# EAGLE board LibreServo_v1_c (EAGLE 9.2.0)
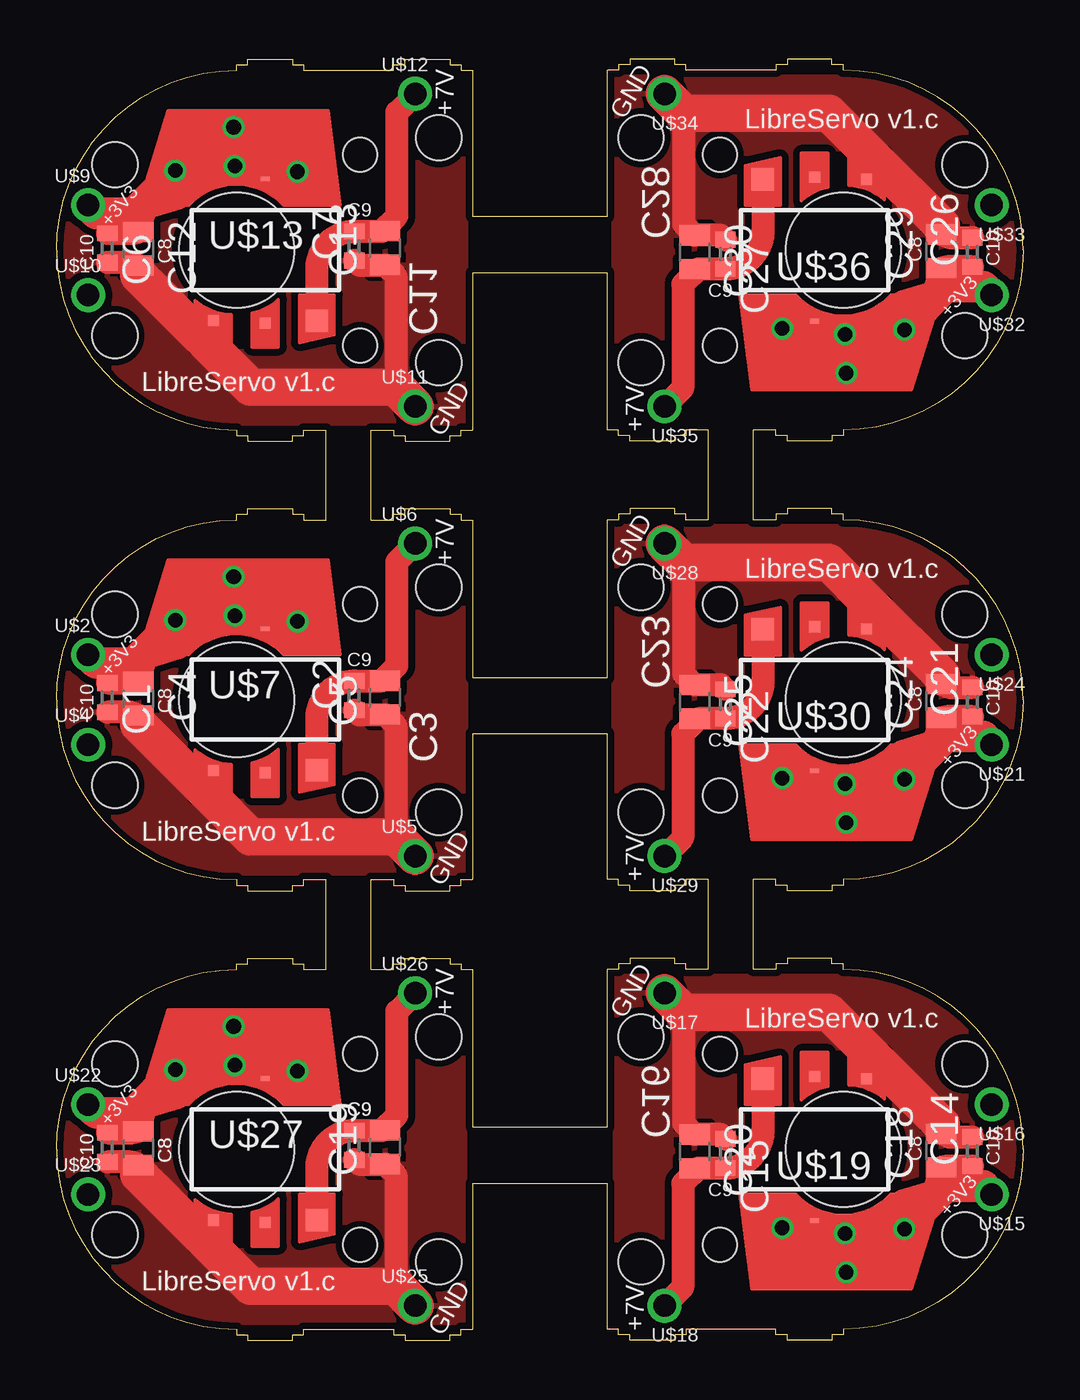
[diagram p0: board, top side]
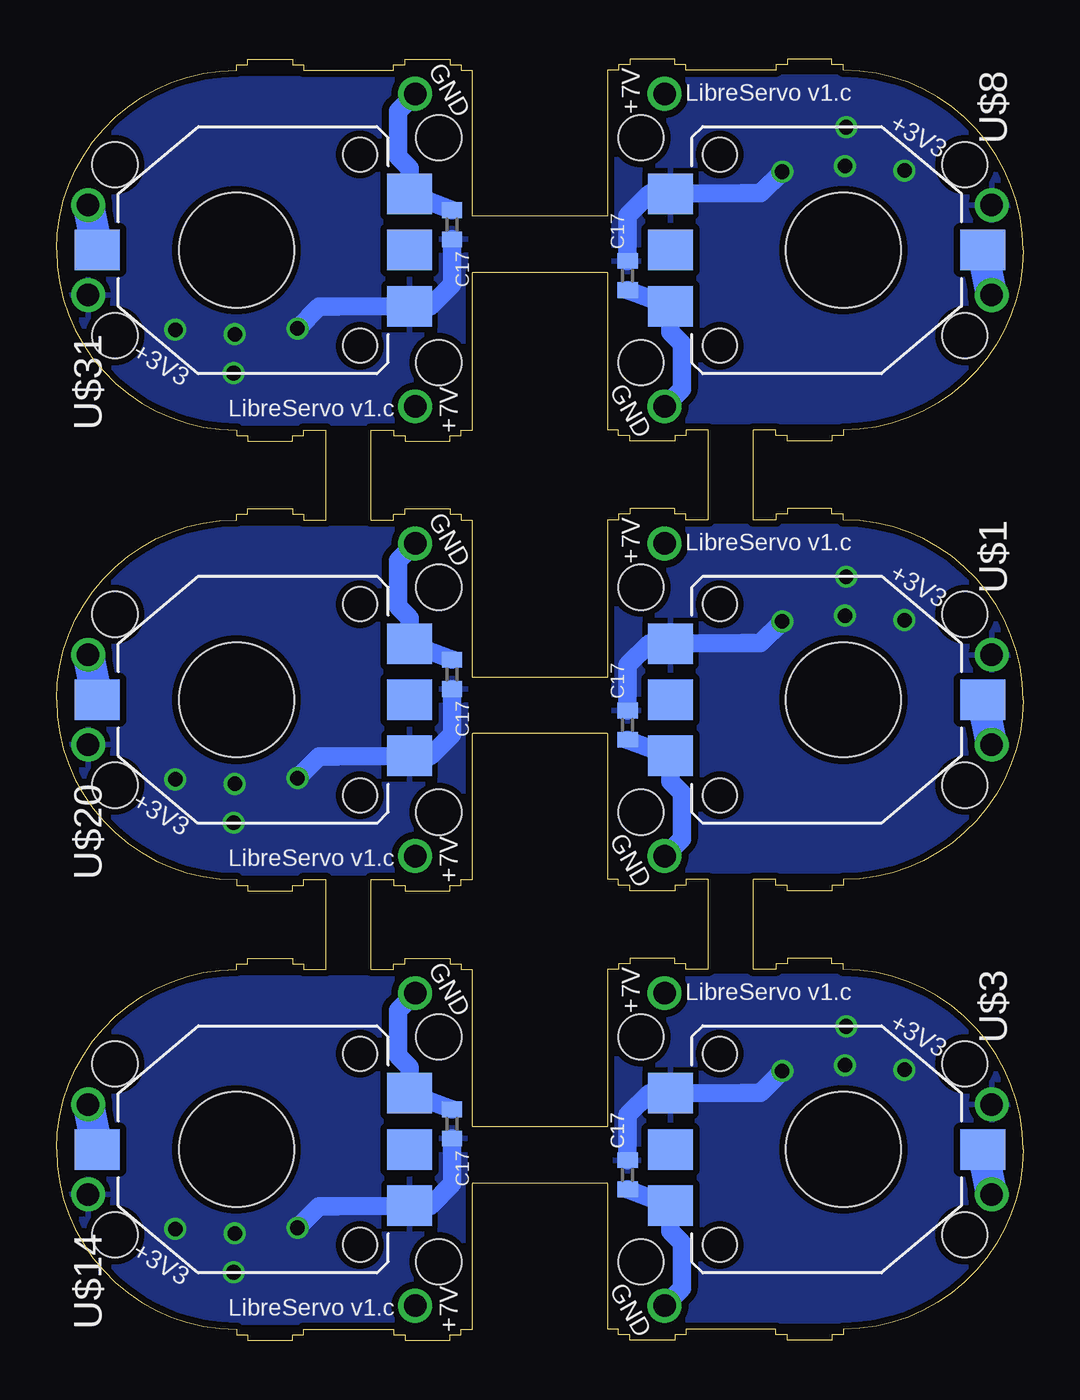
[diagram p1: board, bottom side, seen from below]

Size 43 x 57 mm. Coordinates in mm from the lower left corner, seen from the top.
Outline: 18.5,16.5 18.5,9.5 24.5,9.5 24.5,16.5 25,16.5 25,16.75 25.5,16.75 25.5,17 27.5,17 27.5,16.75 28,16.75 28,16.5 29,16.5 29,20.5 28,20.5 28,20.25 27.5,20.25 27.5,20 25.5,20 25.5,20.25 25,20.25 25,20.5 24.5,20.5 24.5,27 18.5,27 18.5,20.5 18,20.5 18,20.25 17.5,20.25 17.5,20 15.5,20 15.5,20.25 15,20.25 15,20.5 14,20.5 14,16.5 15,16.5 15,16.75 15.5,16.75 15.5,17 17.5,17 17.5,16.75 18,16.75 18,16.5 18.5,16.5
Outline: 18.5,7 18.5,0.5 18,0.5 18,0.25 17.5,0.25 17.5,0 15.5,0 15.5,0.25 15,0.25 15,0.5 11,0.5 11,0.25 10.5,0.25 10.5,0 8.5,0 8.5,0.25 8,0.25 8,0.5 arc-90 0,8.5 arc-90 8,16.5 8,16.75 8.5,16.75 8.5,17 10.5,17 10.5,16.75 11,16.75 11,16.5 12,16.5 12,20.5 11,20.5 11,20.25 10.5,20.25 10.5,20 8.5,20 8.5,20.25 8,20.25 8,20.5 arc-90 0,28.5 arc-90 8,36.5 8,36.75 8.5,36.75 8.5,37 10.5,37 10.5,36.75 11,36.75 11,36.5 12,36.5 12,40.5 11,40.5 11,40.25 10.5,40.25 10.5,40 8.5,40 8.5,40.25 8,40.25 8,40.5 arc-90 0,48.5 arc-90 8,56.5 8,56.75 8.5,56.75 8.5,57 10.5,57 10.5,56.75 11,56.75 11,56.5 15,56.5 15,56.75 15.5,56.75 15.5,57 17.5,57 17.5,56.75 18,56.75 18,56.5 18.5,56.5 18.5,50 24.5,50 24.5,56.5 25,56.5 25,56.75 25.5,56.75 25.5,57 27.5,57 27.5,56.75 28,56.75 28,56.5 32,56.5 32,56.75 32.5,56.75 32.5,57 34.5,57 34.5,56.75 35,56.75 35,56.5 arc-90 43,48.5 arc-90 35,40.5 35,40.25 34.5,40.25 34.5,40 32.5,40 32.5,40.25 32,40.25 32,40.5 31,40.5 31,36.5 32,36.5 32,36.75 32.5,36.75 32.5,37 34.5,37 34.5,36.75 35,36.75 35,36.5 arc-90 43,28.5 arc-90 35,20.5 35,20.25 34.5,20.25 34.5,20 32.5,20 32.5,20.25 32,20.25 32,20.5 31,20.5 31,16.5 32,16.5 32,16.75 32.5,16.75 32.5,17 34.5,17 34.5,16.75 35,16.75 35,16.5 arc-90 43,8.5 arc-90 35,0.5 35,0.25 34.5,0.25 34.5,0 32.5,0 32.5,0.25 32,0.25 32,0.5 28,0.5 28,0.25 27.5,0.25 27.5,0 25.5,0 25.5,0.25 25,0.25 25,0.5 24.5,0.5 24.5,7 18.5,7
Outline: 18.5,36.5 18.5,29.5 24.5,29.5 24.5,36.5 25,36.5 25,36.75 25.5,36.75 25.5,37 27.5,37 27.5,36.75 28,36.75 28,36.5 29,36.5 29,40.5 28,40.5 28,40.25 27.5,40.25 27.5,40 25.5,40 25.5,40.25 25,40.25 25,40.5 24.5,40.5 24.5,47.5 18.5,47.5 18.5,40.5 18,40.5 18,40.25 17.5,40.25 17.5,40 15.5,40 15.5,40.25 15,40.25 15,40.5 14,40.5 14,36.5 15,36.5 15,36.75 15.5,36.75 15.5,37 17.5,37 17.5,36.75 18,36.75 18,36.5 18.5,36.5
Copper layers (1*16): Top 0.035mm / dielectric 1.5mm / Bottom 0.035mm
Design rules "ITEADstudio_DRC": minimum track width 6mil, minimum drill 12mil, track to track 6mil, track to pad 6mil, pad to pad 6mil, via to via 6mil, smd to smd 0mil, copper to edge 10mil, drill to drill 10mil, minimum pad ring 10mil, minimum via ring 6mil, stop-mask expansion 2mil, vias tented up to drill 100mil, thermal gap 10mil
Holes 2 mm at 2.6,12.3 2.6,4.7 17,13.5 17,3.5 2.6,32.3 2.6,24.7 17,33.5 17,23.5 2.6,52.3 2.6,44.7 17,53.5 17,43.5 40.4,4.7 40.4,12.3 26,3.5 26,13.5 40.4,24.7 40.4,32.3 26,23.5 26,33.5 40.4,44.7 40.4,52.3 26,43.5 26,53.5

## Footprints (pad centres in the part's own frame; a part is rotated, then mirrored left to right if it is on the bottom)
C0402 = smd 0.7 x 0.9: 1 -0.65,0; 2 0.65,0
0805_MIN = smd 0.9 x 1.35: 1 -0.75,0; 2 0.75,0
MURATA_SV01 = smd 1.8 x 2: P$1 -2.5,-7.7; P$2 0,-7.7; P$3 2.5,-7.7; P$4 0,6.2 | hole 5.1: 0,0 | hole 1.5: -4.25,-5.5; 4.25,-5.5
HEADER_1_MIN = drill 1: P$1 0,0
SOT223_MOD = smd 0.5 x 0.5: P$1 -2.3,-3.15; P$2 0,-3.252 | smd 1 x 1: P$3 2.3,-3.15 | smd 0.406 x 0.203: P$4 0,3.15

## Placement (x,y rotation side)
C1  100nF  [C0402]  2.26,28.6 270 top
C2  100nF  [C0402]  13.24,28.69 90 top
C3  100nF  [C0402]  17.6,27.37 270 bottom
C4  22uF  [0805_MIN]  3.65,28.55 270 top
C5  22uF  [0805_MIN]  14.61,28.59 90 top
C6  100nF  [C0402]  2.26,48.6 270 top
C7  100nF  [C0402]  13.24,48.69 90 top
C8  22uF  [0805_MIN]  3.65,8.55 270 top
C9  100nF  [C0402]  13.24,8.69 90 top
C10  100nF  [C0402]  2.26,8.6 270 top
C11  100nF  [C0402]  17.6,47.37 270 bottom
C12  22uF  [0805_MIN]  3.65,48.55 270 top
C13  22uF  [0805_MIN]  14.61,48.59 90 top
C14  100nF  [C0402]  40.74,8.4 90 top
C15  100nF  [C0402]  29.76,8.31 270 top
C16  100nF  [C0402]  25.4,9.63 90 bottom
C17  100nF  [C0402]  17.6,7.37 270 bottom
C18  22uF  [0805_MIN]  39.35,8.45 90 top
C19  22uF  [0805_MIN]  14.61,8.59 90 top
C20  22uF  [0805_MIN]  28.39,8.41 270 top
C21  100nF  [C0402]  40.74,28.4 90 top
C22  100nF  [C0402]  29.76,28.31 270 top
C23  100nF  [C0402]  25.4,29.63 90 bottom
C24  22uF  [0805_MIN]  39.35,28.45 90 top
C25  22uF  [0805_MIN]  28.39,28.41 270 top
C26  100nF  [C0402]  40.74,48.4 90 top
C27  100nF  [C0402]  29.76,48.31 270 top
C28  100nF  [C0402]  25.4,49.63 90 bottom
C29  22uF  [0805_MIN]  39.35,48.45 90 top
C30  22uF  [0805_MIN]  28.39,48.41 270 top
U$1  MURATA_SV01  [MURATA_SV01]  8,28.5 270 bottom
U$2  HEADER_1_MIN  [HEADER_1_MIN]  1.4,30.5 0 top
U$3  MURATA_SV01  [MURATA_SV01]  8,8.5 270 bottom
U$4  HEADER_1_MIN  [HEADER_1_MIN]  1.4,26.5 0 top
U$5  HEADER_1_MIN  [HEADER_1_MIN]  15.95,21.55 0 top
U$6  HEADER_1_MIN  [HEADER_1_MIN]  15.95,35.45 0 top
U$7  NCP1117DT33G  [SOT223_MOD]  9.28,28.51 0 top
U$8  MURATA_SV01  [MURATA_SV01]  8,48.5 270 bottom
U$9  HEADER_1_MIN  [HEADER_1_MIN]  1.4,50.5 0 top
U$10  HEADER_1_MIN  [HEADER_1_MIN]  1.4,46.5 0 top
U$11  HEADER_1_MIN  [HEADER_1_MIN]  15.95,41.55 0 top
U$12  HEADER_1_MIN  [HEADER_1_MIN]  15.95,55.45 0 top
U$13  NCP1117DT33G  [SOT223_MOD]  9.28,48.51 0 top
U$14  MURATA_SV01  [MURATA_SV01]  35,8.5 90 bottom
U$15  HEADER_1_MIN  [HEADER_1_MIN]  41.6,6.5 180 top
U$16  HEADER_1_MIN  [HEADER_1_MIN]  41.6,10.5 180 top
U$17  HEADER_1_MIN  [HEADER_1_MIN]  27.05,15.45 180 top
U$18  HEADER_1_MIN  [HEADER_1_MIN]  27.05,1.55 180 top
U$19  NCP1117DT33G  [SOT223_MOD]  33.72,8.49 180 top
U$20  MURATA_SV01  [MURATA_SV01]  35,28.5 90 bottom
U$21  HEADER_1_MIN  [HEADER_1_MIN]  41.6,26.5 180 top
U$22  HEADER_1_MIN  [HEADER_1_MIN]  1.4,10.5 0 top
U$23  HEADER_1_MIN  [HEADER_1_MIN]  1.4,6.5 0 top
U$24  HEADER_1_MIN  [HEADER_1_MIN]  41.6,30.5 180 top
U$25  HEADER_1_MIN  [HEADER_1_MIN]  15.95,1.55 0 top
U$26  HEADER_1_MIN  [HEADER_1_MIN]  15.95,15.45 0 top
U$27  NCP1117DT33G  [SOT223_MOD]  9.28,8.51 0 top
U$28  HEADER_1_MIN  [HEADER_1_MIN]  27.05,35.45 180 top
U$29  HEADER_1_MIN  [HEADER_1_MIN]  27.05,21.55 180 top
U$30  NCP1117DT33G  [SOT223_MOD]  33.72,28.49 180 top
U$31  MURATA_SV01  [MURATA_SV01]  35,48.5 90 bottom
U$32  HEADER_1_MIN  [HEADER_1_MIN]  41.6,46.5 180 top
U$33  HEADER_1_MIN  [HEADER_1_MIN]  41.6,50.5 180 top
U$34  HEADER_1_MIN  [HEADER_1_MIN]  27.05,55.45 180 top
U$35  HEADER_1_MIN  [HEADER_1_MIN]  27.05,41.55 180 top
U$36  NCP1117DT33G  [SOT223_MOD]  33.72,48.49 180 top

## Library data of the parts
C1-C3 C6 C7 C9-C11 C14-C17 C21-C23 C26-C28 = rcl
C4 C5 C8 C12 C13 C18-C20 C24 C25 C29 C30 U$1-U$36 = Propio

## Nets
+3V3_1: C1.1 C3.1 C4.1 U$1.P$1 U$2.P$1 U$7.P$4
+3V3_2: C6.1 C11.1 C12.1 U$8.P$1 U$9.P$1 U$13.P$4
+3V3_3: C8.1 C10.1 C17.1 U$3.P$1 U$22.P$1 U$27.P$4
+3V3_4: C14.1 C16.1 C18.1 U$14.P$1 U$15.P$1 U$19.P$4
+3V3_5: C21.1 C23.1 C24.1 U$20.P$1 U$21.P$1 U$30.P$4
+3V3_6: C26.1 C28.1 C29.1 U$31.P$1 U$32.P$1 U$36.P$4
+7V_1: C2.2 C5.2 U$6.P$1 U$7.P$3
+7V_2: C7.2 C13.2 U$12.P$1 U$13.P$3
+7V_3: C9.2 C19.2 U$26.P$1 U$27.P$3
+7V_4: C15.2 C20.2 U$18.P$1 U$19.P$3
+7V_5: C22.2 C25.2 U$29.P$1 U$30.P$3
+7V_6: C27.2 C30.2 U$35.P$1 U$36.P$3
GND1: C1.2 C2.1 C3.2 C4.2 C5.1 U$1.P$3 U$5.P$1 U$7.P$1
GND2: C6.2 C7.1 C11.2 C12.2 C13.1 U$8.P$3 U$11.P$1 U$13.P$1
GND3: C8.2 C9.1 C10.2 C17.2 C19.1 U$3.P$3 U$25.P$1 U$27.P$1
GND4: C14.2 C15.1 C16.2 C18.2 C20.1 U$14.P$3 U$17.P$1 U$19.P$1
GND5: C21.2 C22.1 C23.2 C24.2 C25.1 U$20.P$3 U$28.P$1 U$30.P$1
GND6: C26.2 C27.1 C28.2 C29.2 C30.1 U$31.P$3 U$34.P$1 U$36.P$1
V_POT_1: U$1.P$4 U$4.P$1
V_POT_2: U$8.P$4 U$10.P$1
V_POT_3: U$3.P$4 U$23.P$1
V_POT_4: U$14.P$4 U$16.P$1
V_POT_5: U$20.P$4 U$24.P$1
V_POT_6: U$31.P$4 U$33.P$1

## Tracks (layer width: path | path; a pad name or v marks a point on that pad's centre or on a via)
+3V3_1  (via drill 0.65)
  Top 0.254: 6.78,32.06 7.99,31.66 | 7.99,31.66 7.99,32.18 v7.92,32.24 | U$7.P$4 7.99,31.66
  Top 1.016: C1.1 3.39,29.25 C4.1 3.99,30.39 5.41,30.82 6.78,32.06
  Top 1.422: U$2.P$1 1.77,30.14 3.45,30.14 5.28,31.96 v5.28,32.04
  Bottom 0.813: C3.1 17.6,30.04 16.64,31 U$1.P$1 12.5,31.02 11.68,31.02 v10.72,31.99
  other vias: 7.87,33.97
  pour Bottom (isolate 0.305): 7.7,36.2 arc90 0,28.5 arc90 7.62,20.88 18.2,20.88 18.2,36.22 16.03,36.22 14.7,36.2 8.79,36.2 14.72,36.22
+3V3_2  (via drill 0.65)
  Top 0.254: 6.78,52.06 7.99,51.66 | 7.99,51.66 7.99,52.18 v7.92,52.24 | U$13.P$4 7.99,51.66
  Top 1.016: C6.1 3.39,49.24 C12.1 3.99,50.39 5.41,50.82 6.78,52.06
  Top 1.422: U$9.P$1 1.77,50.13 3.45,50.13 5.28,51.96 v5.28,52.04
  Bottom 0.813: C11.1 17.6,50.04 16.64,51 U$8.P$1 12.5,51.02 11.68,51.02 v10.72,51.99
  other vias: 7.87,53.97
  pour Bottom (isolate 0.305): 7.7,56.2 arc90 0,48.5 arc90 7.62,40.88 18.2,40.88 18.2,56.22 16.03,56.22 14.7,56.2 8.79,56.2 14.72,56.22
+3V3_3  (via drill 0.65)
  Top 0.254: 6.78,12.06 7.99,11.66 | 7.99,11.66 7.99,12.18 v7.92,12.24 | U$27.P$4 7.99,11.66
  Top 1.016: C10.1 3.39,9.24 C8.1 3.99,10.39 5.41,10.82 6.78,12.06
  Top 1.422: U$22.P$1 1.77,10.13 3.45,10.13 5.28,11.96 v5.28,12.04
  Bottom 0.813: C17.1 17.6,10.04 16.64,11 U$3.P$1 12.5,11.02 11.68,11.02 v10.72,11.99
  other vias: 7.87,13.97
  pour Bottom (isolate 0.305): 7.7,16.2 arc90 0,8.5 arc90 7.62,0.88 18.15,0.88 18.15,16.22 16.03,16.22 14.7,16.2 8.79,16.2 14.72,16.22
+3V3_4  (via drill 0.65)
  Top 0.254: 36.22,4.93 35.01,5.34 | 35.01,5.34 35.01,4.82 v35.08,4.76 | U$19.P$4 35.01,5.34
  Top 1.016: C14.1 39.61,7.75 C18.1 39.01,6.61 37.59,6.18 36.22,4.93
  Top 1.422: U$15.P$1 41.23,6.87 39.55,6.87 37.72,5.04 v37.72,4.96
  Bottom 0.813: C16.1 25.4,6.96 26.36,6 U$14.P$1 30.5,5.98 31.32,5.98 v32.28,5.01
  other vias: 35.13,3.03
  pour Bottom (isolate 0.305): 35.3,0.8 arc90 43,8.5 arc90 35.38,16.12 24.83,16.12 24.83,0.78 26.97,0.78 28.3,0.8 34.21,0.8 28.28,0.78
+3V3_5  (via drill 0.65)
  Top 0.254: 36.22,24.93 35.01,25.34 | 35.01,25.34 35.01,24.82 v35.08,24.76 | U$30.P$4 35.01,25.34
  Top 1.016: C21.1 39.61,27.75 C24.1 39.01,26.61 37.59,26.18 36.22,24.93
  Top 1.422: U$21.P$1 41.23,26.86 39.55,26.86 37.72,25.04 v37.72,24.96
  Bottom 0.813: C23.1 25.4,26.96 26.36,26 U$20.P$1 30.5,25.98 31.32,25.98 v32.28,25.01
  other vias: 35.13,23.03
  pour Bottom (isolate 0.305): 35.3,20.8 arc90 43,28.5 arc90 35.38,36.12 24.8,36.12 24.8,20.78 26.97,20.78 28.3,20.8 34.21,20.8 28.28,20.78
+3V3_6  (via drill 0.65)
  Top 0.254: 36.22,44.94 35.01,45.34 | 35.01,45.34 35.01,44.82 v35.08,44.76 | U$36.P$4 35.01,45.34
  Top 1.016: C26.1 39.61,47.76 C29.1 39.01,46.61 37.59,46.18 36.22,44.94
  Top 1.422: U$32.P$1 41.23,46.87 39.55,46.87 37.72,45.04 v37.72,44.96
  Bottom 0.813: C28.1 25.4,46.96 26.36,46 U$31.P$1 30.5,45.98 31.32,45.98 v32.28,45.01
  other vias: 35.13,43.03
  pour Bottom (isolate 0.305): 35.3,40.8 arc90 43,48.5 arc90 35.38,56.12 24.8,56.12 24.8,40.78 26.97,40.78 28.3,40.8 34.21,40.8 28.28,40.78
+7V_1
  Top 0.254: C5.2 14.46,29.34
  Top 1.016: U$7.P$3 11.58,27.68 arc-90 C2.2 14.46,29.34 15.14,30.02 15.14,34.64 U$6.P$1
+7V_2
  Top 0.254: C13.2 14.46,49.34
  Top 1.016: U$13.P$3 11.58,47.67 arc-90 C7.2 14.46,49.34 15.14,50.02 15.14,54.64 U$12.P$1
+7V_3
  Top 0.254: C19.2 14.46,9.34
  Top 1.016: U$27.P$3 11.58,7.67 arc-90 C9.2 14.46,9.34 15.14,10.02 15.14,14.64 U$26.P$1
+7V_4
  Top 0.254: C20.2 28.54,7.66
  Top 1.016: U$19.P$3 31.42,9.32 arc-90 C15.2 28.54,7.66 27.86,6.98 27.86,2.36 U$18.P$1
+7V_5
  Top 0.254: C25.2 28.54,27.66
  Top 1.016: U$30.P$3 31.42,29.32 arc-90 C22.2 28.54,27.66 27.86,26.98 27.86,22.36 U$29.P$1
+7V_6
  Top 0.254: C30.2 28.54,47.66
  Top 1.016: U$36.P$3 31.42,49.33 arc-90 C27.2 28.54,47.66 27.86,46.98 27.86,42.36 U$35.P$1
GND1
  Top 1.016: 3.65,27.4 C4.2 3.31,27.95 C1.2 | C2.1 13.44,27.84 C5.1 15.09,27.36 15.09,22.41
  Top 1.676: U$5.P$1 15.09,22.41 8.64,22.41 6.77,24.28 | 6.77,24.28 3.65,27.4 | 6.77,24.28
  Bottom 0.813: C3.2 U$1.P$3 15.7,24.85 15.19,24.34 15.19,22.31 U$5.P$1
  pour Top (isolate 0.305): 7.7,36.2 arc90 0,28.5 arc90 7.7,20.8 18.2,20.8 18.2,36.2
GND2
  Top 1.016: 3.65,47.4 C12.2 3.31,47.95 C6.2 | C7.1 13.44,47.84 C13.1 15.09,47.36 15.09,42.41
  Top 1.676: U$11.P$1 15.09,42.41 8.64,42.41 6.77,44.28 | 6.77,44.28 3.65,47.4 | 6.77,44.28
  Bottom 0.813: C11.2 U$8.P$3 15.7,44.85 15.19,44.34 15.19,42.31 U$11.P$1
  pour Top (isolate 0.305): 7.7,56.2 arc90 0,48.5 arc90 7.7,40.8 18.2,40.8 18.2,56.2
GND3
  Top 1.016: 3.65,7.4 C8.2 3.31,7.95 C10.2 | C9.1 13.44,7.84 C19.1 15.09,7.36 15.09,2.41
  Top 1.676: U$25.P$1 15.09,2.41 8.64,2.41 6.77,4.28 | 6.77,4.28 3.65,7.4 | 6.77,4.28
  Bottom 0.813: C17.2 U$3.P$3 15.7,4.85 15.19,4.34 15.19,2.31 U$25.P$1
  pour Top (isolate 0.305): 7.7,16.2 arc90 0,8.5 arc90 7.7,0.8 18.15,0.8 18.15,16.2
GND4
  Top 1.016: 39.35,9.6 C18.2 39.69,9.05 C14.2 | C15.1 29.56,9.16 C20.1 27.91,9.64 27.91,14.59
  Top 1.676: U$17.P$1 27.91,14.59 34.36,14.59 36.23,12.72 | 36.23,12.72 39.35,9.6 | 36.23,12.72
  Bottom 0.813: C16.2 U$14.P$3 27.3,12.15 27.81,12.66 27.81,14.69 U$17.P$1
  pour Top (isolate 0.305): 35.3,0.8 arc90 43,8.5 arc90 35.3,16.2 24.85,16.2 24.85,0.8
GND5
  Top 1.016: 39.35,29.6 C24.2 39.69,29.05 C21.2 | C22.1 29.56,29.16 C25.1 27.91,29.64 27.91,34.59
  Top 1.676: U$28.P$1 27.91,34.59 34.36,34.59 36.23,32.72 | 36.23,32.72 39.35,29.6 | 36.23,32.72
  Bottom 0.813: C23.2 U$20.P$3 27.3,32.15 27.81,32.66 27.81,34.69 U$28.P$1
  pour Top (isolate 0.305): 35.3,20.8 arc90 43,28.5 arc90 35.3,36.2 24.8,36.2 24.8,20.8
GND6
  Top 1.016: 39.35,49.6 C29.2 39.69,49.05 C26.2 | C27.1 29.56,49.16 C30.1 27.91,49.64 27.91,54.59
  Top 1.676: U$34.P$1 27.91,54.59 34.36,54.59 36.23,52.72 | 36.23,52.72 39.35,49.6 | 36.23,52.72
  Bottom 0.813: C28.2 U$31.P$3 27.3,52.15 27.81,52.66 27.81,54.69 U$34.P$1
  pour Top (isolate 0.305): 35.3,40.8 arc90 43,48.5 arc90 35.3,56.2 24.8,56.2 24.8,40.8
V_POT_1
  Bottom 1.422: U$4.P$1 U$1.P$4
V_POT_2
  Bottom 1.422: U$10.P$1 U$8.P$4
V_POT_3
  Bottom 1.422: U$23.P$1 U$3.P$4
V_POT_4
  Bottom 1.422: U$16.P$1 U$14.P$4
V_POT_5
  Bottom 1.422: U$24.P$1 U$20.P$4
V_POT_6
  Bottom 1.422: U$33.P$1 U$31.P$4

## Text on the board
_tNames: GND | +7V | LibreServo v1.c | C9 | C10 | +3V3 | C8 | C8 | C10 | C9 | +3V3 | LibreServo v1.c | +7V | GND | GND | +7V | LibreServo v1.c | C9 | C10 | +3V3 | C8 | C8 | C10 | C9 | +3V3 | LibreServo v1.c | +7V | GND | GND | +7V | LibreServo v1.c | C9 | C10 | +3V3 | C8 | C8 | C10 | C9 | +3V3 | LibreServo v1.c | +7V | GND
_bNames: GND | LibreServo v1.c | +7V | +3V3 | C17 | C17 | +3V3 | +7V | LibreServo v1.c | GND | GND | LibreServo v1.c | +7V | +3V3 | C17 | C17 | +3V3 | +7V | LibreServo v1.c | GND | GND | LibreServo v1.c | +7V | +3V3 | C17 | C17 | +3V3 | +7V | LibreServo v1.c | GND